# Altium PCB PCB2.PcbDoc
Units mm, origin at the board's own origin, x right, y up, seen from the top; angles counter-clockwise.
Board outline 70.66 x 68.07 mm, 2 copper layers (Top Layer, Bottom Layer); 10 components, 10 nets, 75 pads, 6 vias.
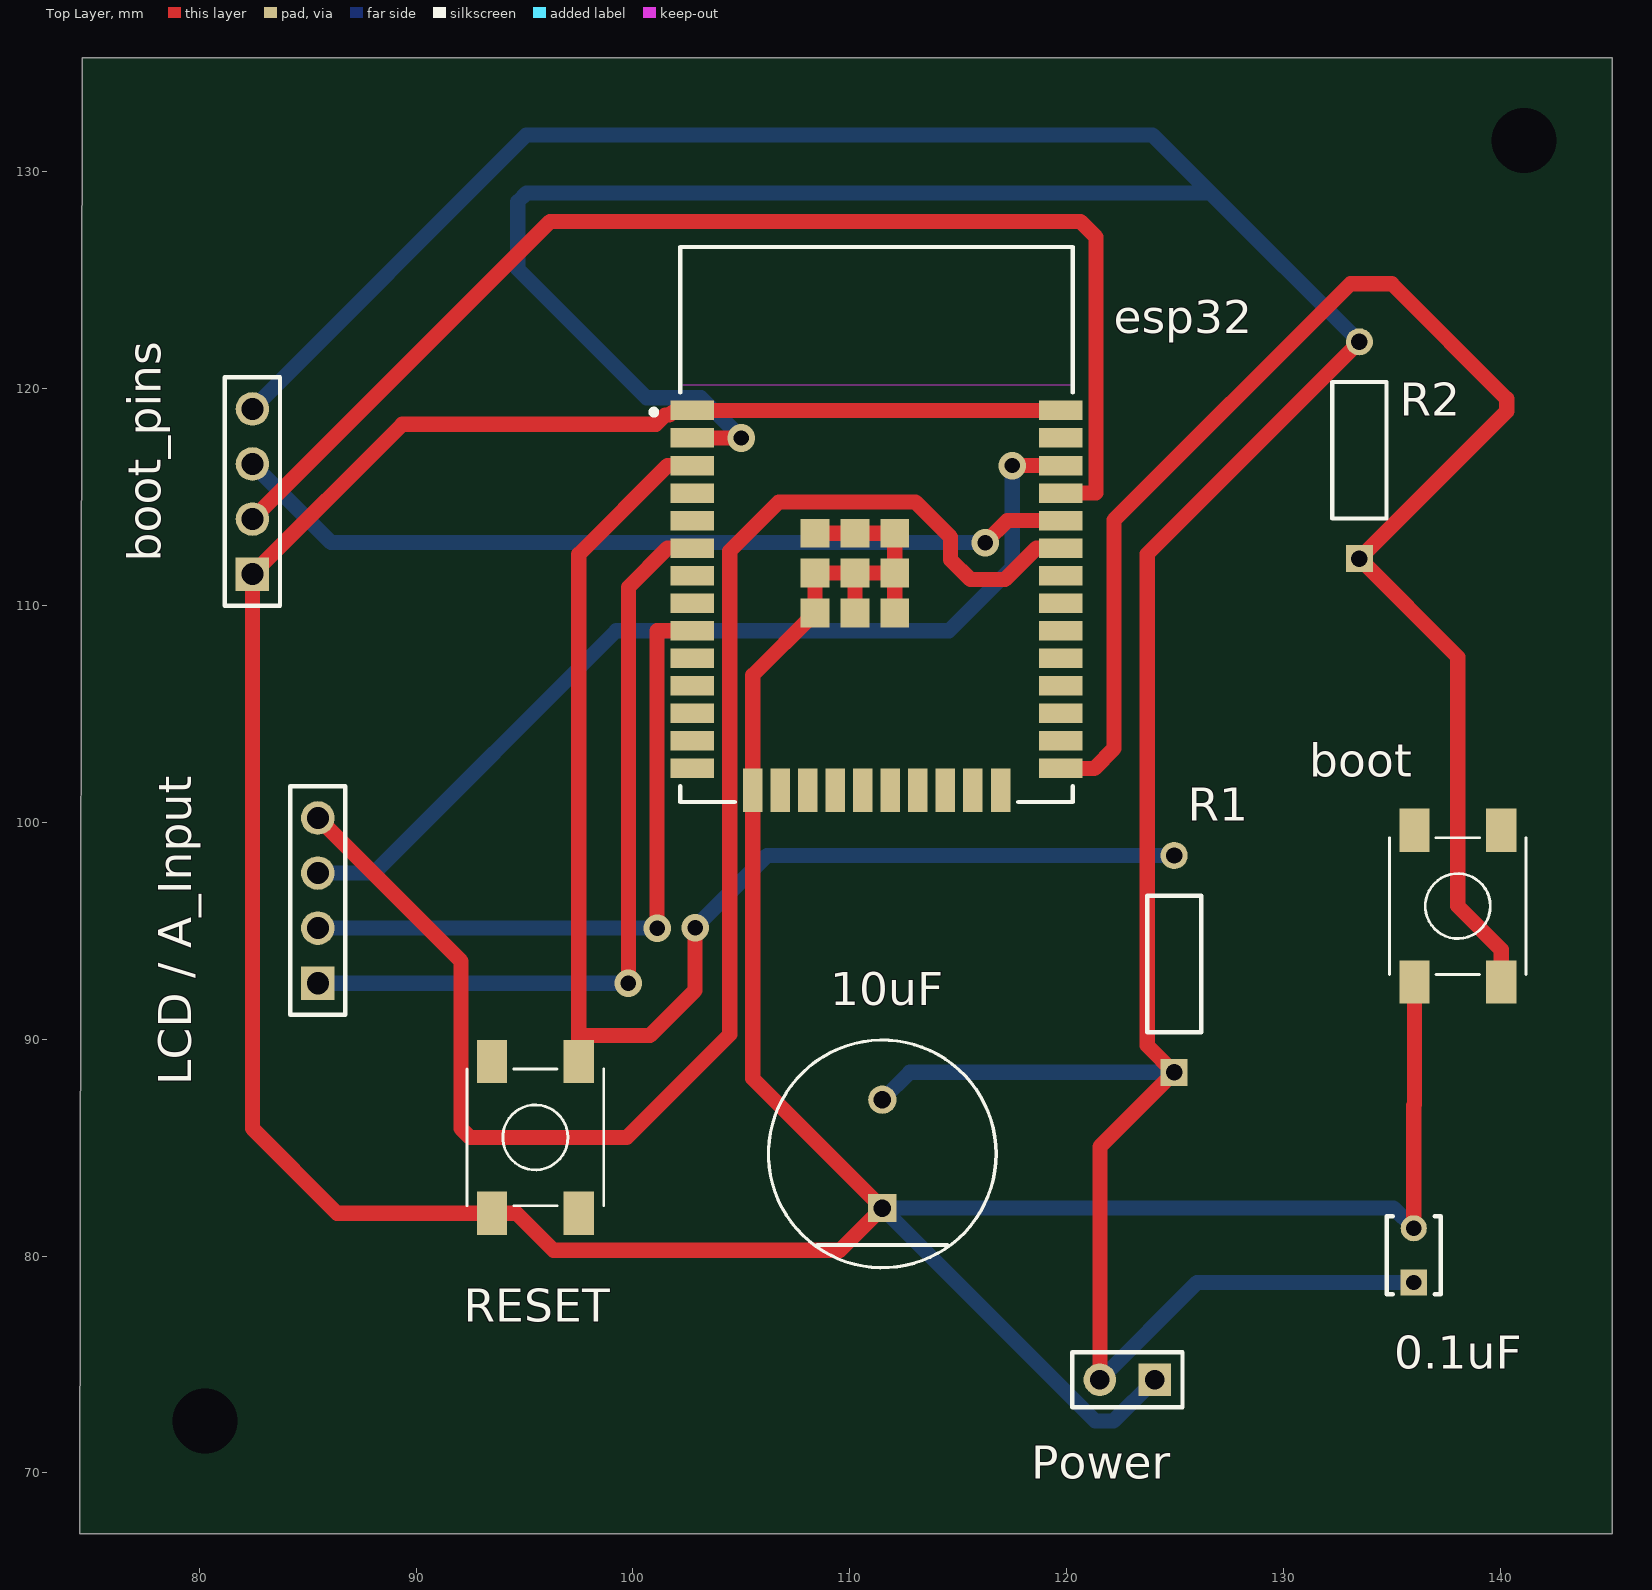
[diagram p0: Top Layer view]
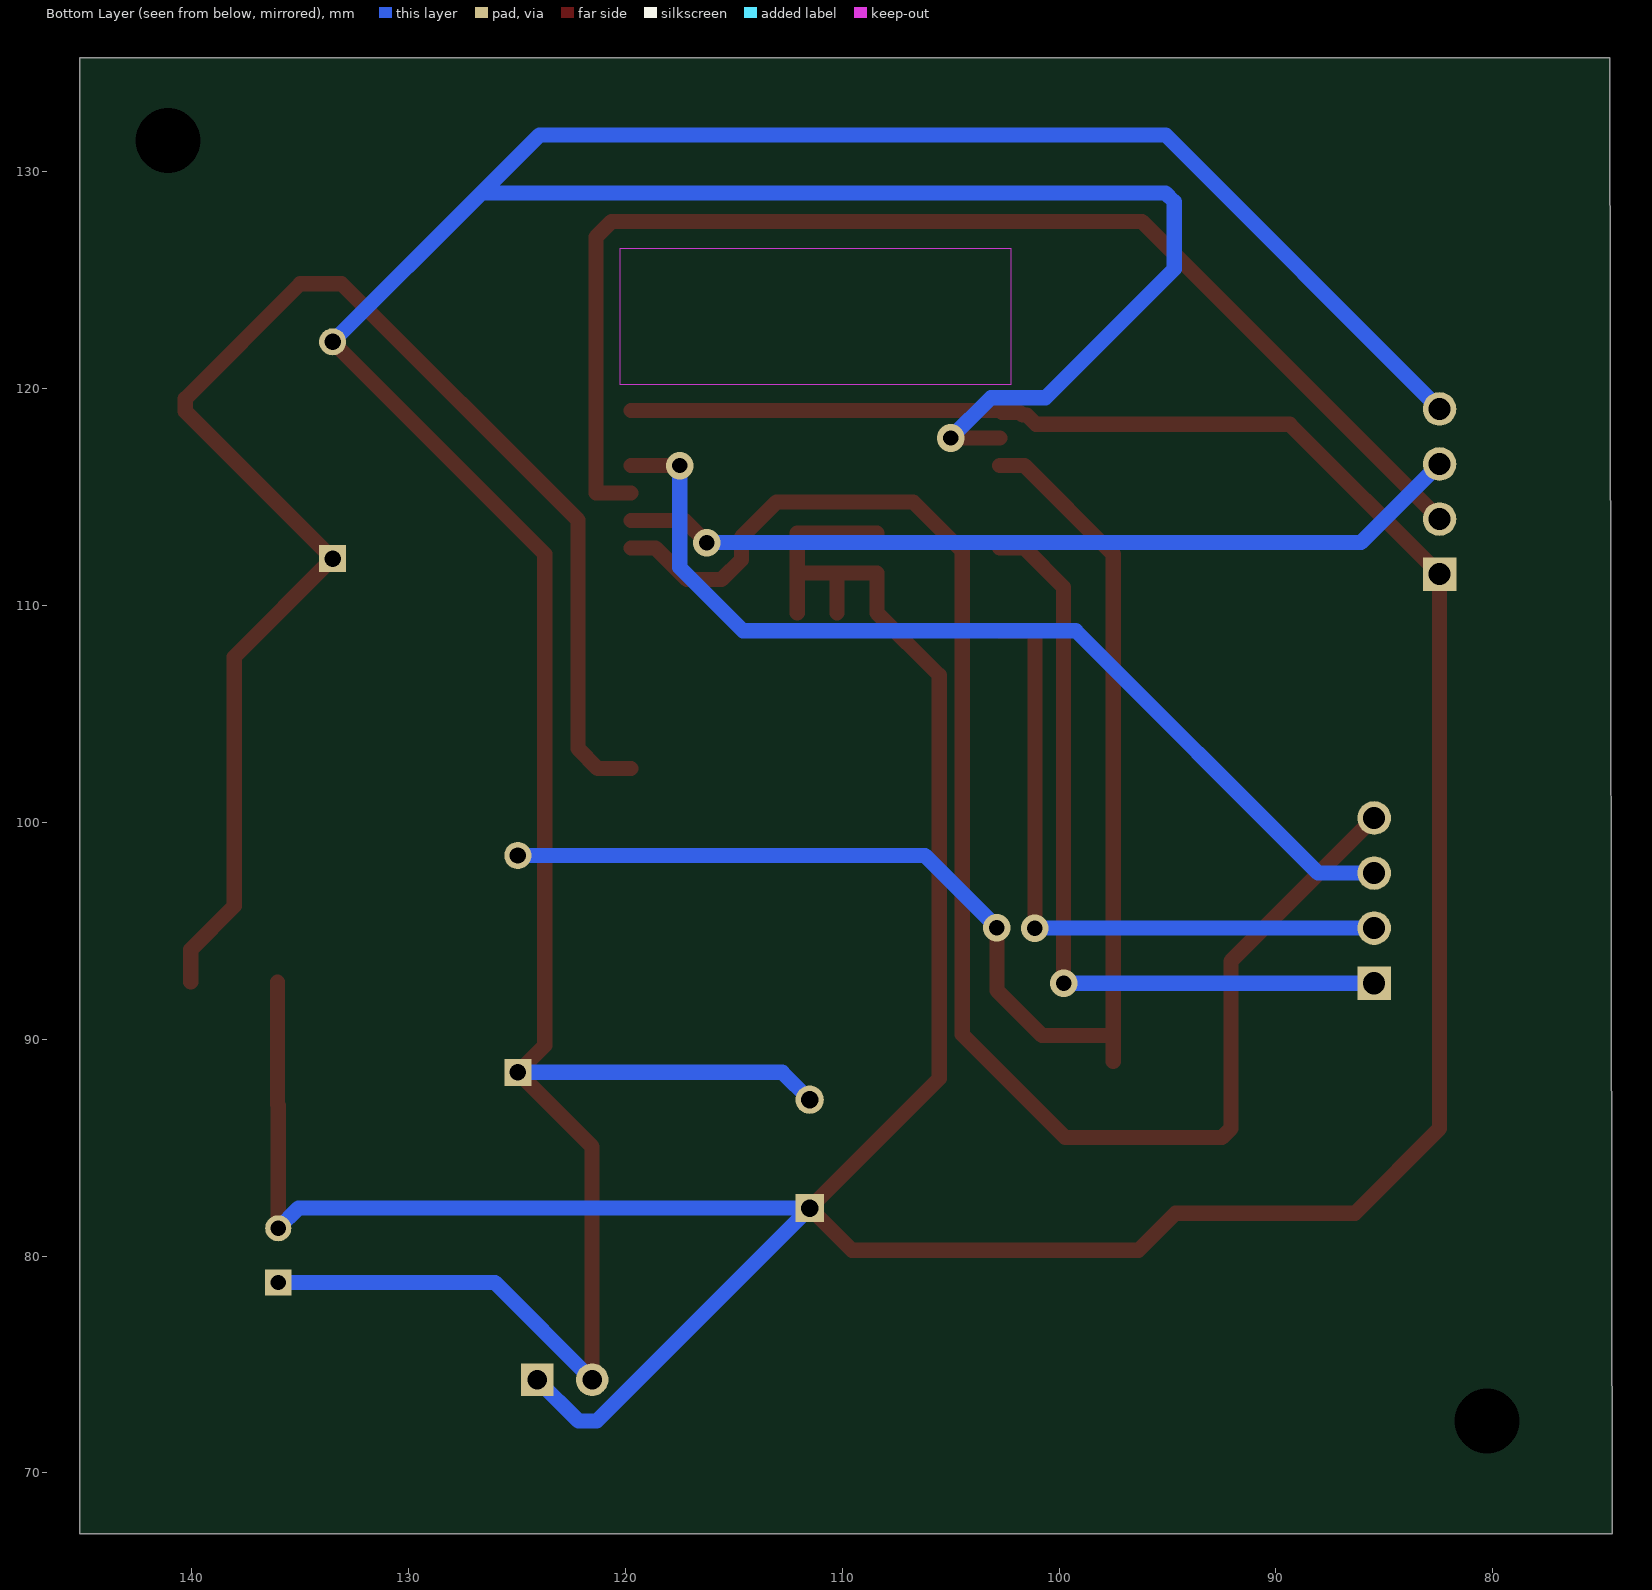
[diagram p1: Bottom Layer view, seen from below]
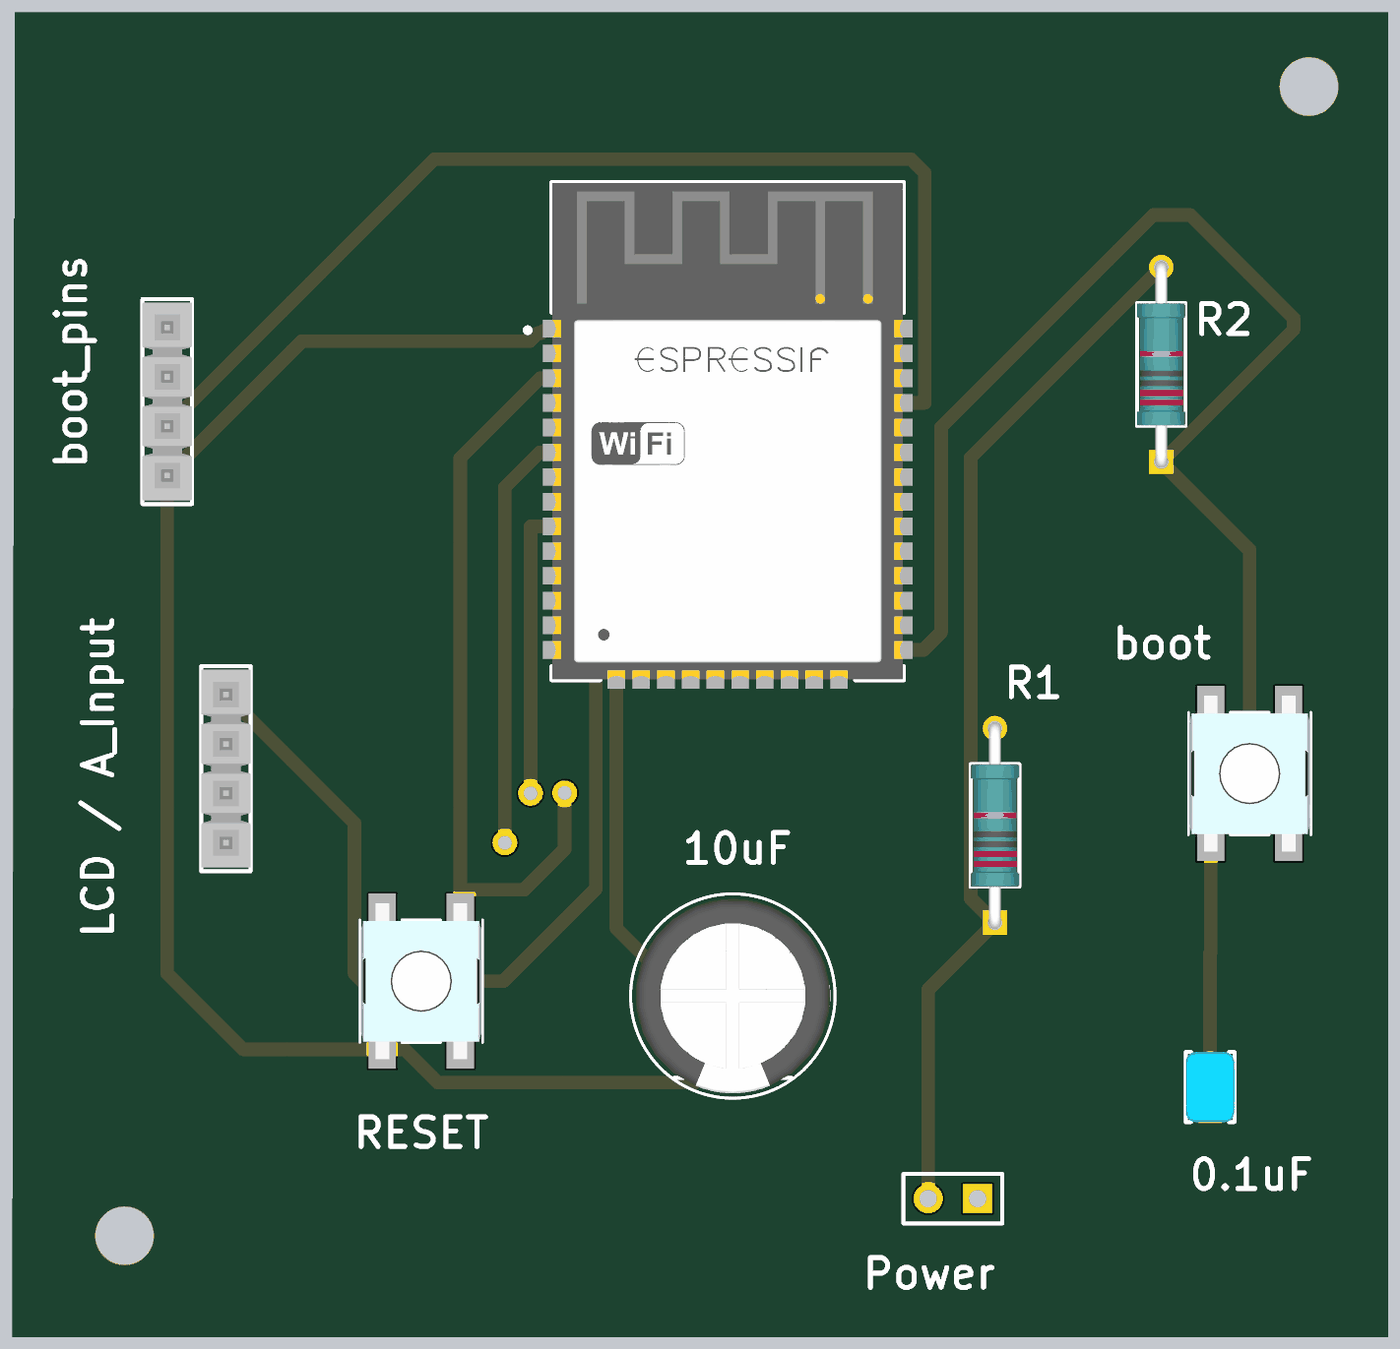
[diagram p2: 3D render of the assembled board from above, using the file's embedded part models]

## Layer stack, top to bottom
Top Solder: solder mask 0.0102, Solder Resist, Dk 3.5
Top Layer: signal copper 0.0356
Dielectric 1: dielectric 0.32, FR-4, Dk 4.8
Bottom Layer: signal copper 0.0356
Bottom Solder: solder mask 0.0102, Solder Resist, Dk 3.5

## Board outline
74.604,135.255 145.161,135.255 145.161,67.183 74.502,67.183

## Design rules (kind name [scope] priority, off if disabled: settings)
Clearance [All] p1: gap=0.254 ignorepadtopadclearanceinfootprint=FALSE except(0: Arc-Hole Track-Hole SMDPad-Hole THPad-Hole Via-Hole Fill-Hole Poly-Hole Region-Hole Text-Hole)
PolygonConnect [All] p1: connectstyle=Relief reliefconductorwidth=0.254 reliefentries=4 polygonreliefangle="90 Angle" airgapwidth=0.254
RoomDefinition Sheet2 [InComponentClass('Sheet2')] p1: confinementstyle=ConfineIn formatcopy=TRUE lockcomponents=FALSE outline 74.803,135.382 74.883,135.259 145.161,135.259 145.161,67.295 144.842,66.802 144.603,67.172 74.963,67.172 74.963,134.889 74.883,135.012
RoutingVias [All] p1: holewidth=0.711 width=1.27 viastyle="Through Hole" minholewidth=0.711 minwidth=1.27 maxholewidth=0.711 maxwidth=1.27
SolderMaskExpansion [All] p1: expansion=0.102 istentingtop=FALSE
Width [All] p1: maxlimit=1.5 minlimit=0.5 preferedwidth=0.7
30 further rules are at their usual default settings.

## Components (designator, comment, footprint, x,y, rotation, side; value= is the part's Value field where it differs from the comment)
0.1uF "C2" FP-RCE0DB-MFG 136.017,80.03 r90 top
10uF "C1" FP-RAD-TH-D_10_0_5-L_16_1-MFG 111.506,84.709 r90 top
boot "430471025826" 430471025826 138.049,96.139 r90 top
boot_pins "TSW-104-08-L-S" SMTC-TSW-104-08-X-S 82.455,111.45 r90 top
esp32 "ESP32-WROOM-32D" FP-ESP32-WROOM-32D-MFG 111.243,113.739 r0 top
"LCD / A_Input" "TSW-104-08-L-S" SMTC-TSW-104-08-X-S 85.471,92.583 r90 top
Power "Header 2" HDR1X2 124.079,74.295 r180 top
R1 "10k" FP-MBB0207-MFG 124.968,93.472 r90 top
R2 "10k" FP-MBB0207-MFG 133.509,117.165 r90 top
RESET "430471025826" 430471025826 95.504,85.471 r90 top

## Footprints (in the part's own frame and the unit in brackets; to place one, negate y for a bottom-side part, rotate by r counter-clockwise, add the part's x,y. Pads: shape width x height; smd on the part's side, far side on the other; paste and mask are expansions set on the pad)
430471025826 [mm] "6*6mm vertical type,SMD, height 2.5mm, white actuator, 260gf, T&R"
  rect 2x1.4 smd: 1(-3.5,2) 2(3.5,2) 3(-3.5,-2) 4(3.5,-2)
  silkscreen extent -3.15,-3.15 3.15,3.15, body extent -4,-3.1 4,3.1, height 2.49
FP-ESP32-WROOM-32D-MFG [mm]
  rect 2x0.9 smd paste+0 mask+0: 1(-8.5,5.26) 2(-8.5,3.99) 3(-8.5,2.72) 4(-8.5,1.45) 5(-8.5,0.18) 6(-8.5,-1.09) 7(-8.5,-2.36) 8(-8.5,-3.63) 9(-8.5,-4.9) 10(-8.5,-6.17) 11(-8.5,-7.44) 12(-8.5,-8.71) 13(-8.5,-9.98) 14(-8.5,-11.25) 25(8.5,-11.25) 26(8.5,-9.98) 27(8.5,-8.71) 28(8.5,-7.44) 29(8.5,-6.17) 30(8.5,-4.9) 31(8.5,-3.63) 32(8.5,-2.36) 33(8.5,-1.09) 34(8.5,0.18) 35(8.5,1.45) 36(8.5,2.72) 37(8.5,3.99) 38(8.5,5.26)
  rect 0.9x2 smd paste+0 mask+0: 15(-5.715,-12.25) 16(-4.445,-12.25) 17(-3.175,-12.25) 18(-1.905,-12.25) 19(-0.635,-12.25) 20(0.635,-12.25) 21(1.905,-12.25) 22(3.175,-12.25) 23(4.445,-12.25) 24(5.715,-12.25)
  rect 1.33x1.33 smd paste+0 mask+0: 39(-2.835,-4.075) 39(-2.835,-2.24) 39(-2.835,-0.405) 39(-1,-4.075) 39(-1,-2.24) 39(-1,-0.405) 39(0.835,-4.075) 39(0.835,-2.24) 39(0.835,-0.405)
  Keep-Out Layer region: -9,6.45 9,6.45 9,12.75 -9,12.75
  Keep-Out Layer region: -9,6.45 9,6.45 9,12.75 -9,12.75
  silkscreen extent -10.4,-12.8 9.05,12.8, body extent -9.6,-13.35 9.6,12.9, height 0.25
FP-MBB0207-MFG [mm]
  rect 1.25x1.25 hole 0.75 paste-1000 mask+0: 1(-5,0)
  round 1.25 hole 0.75 paste-1000 mask+0: 2(5,0)
  silkscreen extent -3.15,-1.25 3.15,1.25, body extent -5.72,-1.35 5.72,1.35, height 0.25
FP-RAD-TH-D_10_0_5-L_16_1-MFG [mm]
  rect 1.3x1.3 hole 0.8 paste-1000 mask+0: 1(-2.5,0)
  round 1.3 hole 0.8 paste-1000 mask+0: 2(2.5,0)
  silkscreen extent -5.25,-5.25 5.25,5.25, body extent -5.35,-5.35 5.35,5.35, height 0.25
FP-RCE0DB-MFG [mm]
  rect 1.2x1.2 hole 0.7 paste-1000 mask+0: 1(-1.25,0)
  round 1.2 hole 0.7 paste-1000 mask+0: 2(1.25,0)
  silkscreen extent -1.8,-1.25 1.8,1.25, body extent -1.95,-1.35 1.95,1.35, height 0.25
HDR1X2 [mm] "Connector; Header; 2 Position"
  rect 1.5x1.5 hole 0.9: 1(0,0)
  round 1.5 hole 0.9: 2(2.54,0)
  silkscreen extent -1.27,-1.27 3.81,1.27
SMTC-TSW-104-08-X-S [mm] ".025 SQ Post Terminal Strip Assembly, 1x4 Pins, Vertical, 2.54mm Pitch, Male"
  rect 1.55x1.55 hole 1.02: 1(0,0)
  round 1.55 hole 1.02: 2(2.54,0) 3(5.08,0) 4(7.62,0)
  silkscreen extent -1.46,-1.27 9.08,1.27, body extent -1.27,-1.27 8.89,1.27, height 8.38

## Part data
0.1uF: library part CMP-06035-048089-1, "Cap Ceramic 100nF 50V X7R ±10% Radial 2.5mm +125°C Ammo Pack", Capacitance=100nF, Case/Package=Radial, Dielectric=X7R, Max Operating Temperature=125°C, Min Operating Temperature=-55°C, Package Quantity=2000, Ratings=AEC-Q200, Resistor Type=Ceramic, Tolerance=10%, Voltage Rating=50V, Height=3.5mm, Height - Seated (Max)=0.138inch, Lead Diameter=0.5mm, Lead Free="Lead Free", Lead Pitch=0.098inch, Lead/Base Style=Straight, Length=0.142inch, Mount="Through Hole", Packaging="Tape and Reel", Termination=Radial, Voltage Rating (DC)=50V, Width=0.098inch
10uF: library part CMP-05427-000979-1, "Aluminum Electrolytic Capacitors (Radial Lead Type) AEC-Q200 Qualified 1000uF ±20% 10V", Capacitance=1mF, Case/Package=Radial, Dielectric Material=Aluminium, ESR (Equivalent Series Resistance)=68mR, Leakage Current=3uA, Max Operating Temperature=105°C, Min Operating Temperature=-55°C, Package Quantity=200, Ratings=AEC-Q200, Ripple Current=1.05A, Tolerance=20%, Voltage=10V, Construction=RADIAL, Contact Plating=Tin, Diameter=10mm, Height=16mm, Height - Seated (Max)=0.63inch, Impedance=68mR, Lead Diameter=0.6mm, Lead Free="Lead Free", Lead Pitch=5mm, Length=16mm, Life (Hours)=3000Hour, Mount="Through Hole", Packaging=Bulk, Radiation Hardening=No, REACH SVHC="No SVHC", RoHS Compliant=Yes, Series=FC, Size=16mm, Termination=Radial, Voltage Rating=10V, Voltage Rating (DC)=10V
boot RESET: library part CMP-1452-00022-1, "WS-TASV SMD Tact Switch 6X6 mm", Manufacturer="Wuerth Elektronik", ComponentLink1Description="Manufacturer URL", ComponentLink1URL=http://www.we-online.com, ComponentLink2Description=Datasheet, ComponentLink2URL=http://katalog.we-online.de/em/datasheet/4304x1.pdf, NoPins=04, PackageReference=430471025826, PartNumber=430471025826
boot_pins "LCD / A_Input": library part CMP-1024-00358-1, "0.025\" SQ Post Header, Through-hole, Vertical, -55 to 125 degC, 2.54 mm Pitch, 4-Pin, Male, RoHS", Manufacturer=Samtec, Temperature Range="-55 to 125 degC", ComponentLink1Description="Manufacturer URL", ComponentLink1URL=http://www.samtec.com, ComponentLink2Description=Datasheet, ComponentLink2URL=http://www.samtec.com/documents/webfiles/pdf/TSW_TH.PDF, ComponentLink3Description="Package Specification", ComponentLink3URL=http://www.samtec.com/documents/webfiles/cpdf/TSW-XXX-XX-XXX-X-XX-XXX-MKT.pdf, DatasheetVersion=F-214, Mounting Technology=Through-hole, Orientation=Vertical, PackageDescription=".025[0.64] SQ. Post Terminal Strip Assembly", PackageReference=TSW-104-08-X-S, PackageVersion="DM, 8/1988", PartNumber=TSW-104-08-L-S, Pitch="2.54 mm", RoHS=True
esp32: library part CMP-194065-000003-1, "WIFI MODULE 32MBITS SPI FLASH", Manufacturer="Espressif Systems", Max Frequency=2484MHz, Max Supply Voltage=3.6V, Min Supply Voltage=3V, Nominal Supply Current=500mA, Temperature="-40°C to +85°C", Temperature Range High=+85°C, Temperature Range Low=-40°C, Automotive=No, Bandwidth=72MHz, Category=UNK, ComponentLink2Description=Datasheet, ComponentLink2URL=https://www.espressif.com/sites/default/files/documentation/esp32-wroom-32d_esp32-wroom-32u_datasheet_en.pdf, Data Rate=150Mbits/s, Device Class L1="Integrated Circuits (ICs)", Device Class L2="RF Semiconductors and Devices", Device Class L3=Transceivers, Digikey Description="WIFI MODULE 32MBITS SPI FLASH", Height=3.2mm, Interface=I2C,SPI,UART,Ethernet,I2S,Other, Lead Free=Yes, Manufacturer Part Number=ESP32-WROOM-32D, Mouser Description="Wi-Fi/BT BLE Module ESP32-D0WD, SPI Flash, UART, P", Number Of Adc Channels=16, Number Of Gpio=32, Octopart=https://octopart.com/esp32-wroom-32d-espressif+systems-91040050, Package=ESP32-WROOM-32D, RoHS=TRUE, Sensitivity=-98dBm
Power: library part CMP-307-000070-1, "Header, 2-Pin", Component Type=Standard, Design Item ID="Header 2", LatestRevisionDate=17-Jul-2002, LatestRevisionNote="Re-released for DXP Platform.", Pin Count=2, Publisher="Altium Limited", Source="Miscellaneous Connectors.SchLib"
R1 R2: library part CMP-02408-000035-1, "RES 10K OHM 0.6W 1% AXIAL", Case/Package=Conformal, Max Operating Temperature=155°C, Max Power Dissipation=600mW, Min Operating Temperature=-55°C, Resistance=10kR, Resistance Tolerance=1%, Resistor Type="Metal Film", Temperature Coefficient=50ppm/°C, Voltage Rating=300V, Construction=Cylindrical, Contact Plating=Tin, Diameter=2.5mm, Features="Automotive AEC-Q200", Lead Free="Lead Free", Length=6.5mm, Military Standard=Not, Number of Terminations=2, Packaging="Tape and Reel", Power Rating=600mW, Radiation Hardening=No, RoHS Compliant=Yes, Series="MBB 0207 - Professional", Technology="THIN FILM", Termination=Axial, Tolerance=1%, Voltage Rating (DC)=300V

## Free pads (board coordinates)
  round 1.524 hole 3: 1(80.264,72.39) 2(141.097,131.445)

## Via types
v1: diameter 1.27, hole 0.711, Top Layer to Bottom Layer, 6 vias

## Nets (pads, with @x,y where several pads share a name; then routed paths per layer and width w, separated by ;. In a path a pad name is that pad's centre, name@x,y a point inside that pad or via, vN(x,y) a via of type N, cw(c..) or ccw(c..) an arc to the next point about the centre after c; other vN are vias at no path point)
Net0.1uF_1: 0.1uF.1 10uF.2 boot_pins.4 esp32.2 Power.2 R1.1 R2.2 | length 195.4
  Top Layer w0.7: esp32.2 v1(105.004,117.729) ; Power.2 121.539,85.043 R1.1 123.723,89.717 123.723,112.379 R2.2
  Bottom Layer w0.7: boot_pins.4 95.084,131.699 123.975,131.699 126.642,129.032 ; v1(105.004,117.729) 103.148,119.585 100.633,119.585 94.691,125.527 94.691,128.622 95.101,129.032 126.642,129.032 ; 10uF.2 112.769,88.472 R1.1 ; Power.2 126.024,78.78 0.1uF.1 ; R2.2 126.642,129.032
Net0.1uF_2: 0.1uF.2 10uF.1 boot.1 boot_pins.1 esp32.1 esp32.15 esp32.38 esp32.39 Power.1 RESET.1 | length 197.7
  Top Layer w0.7: esp32.39@108.408,113.334 110.243,113.334 112.078,113.334 esp32.39@112.078,111.499 ; esp32.39@110.243,109.664 esp32.39@110.243,111.499 ; esp32.39@112.078,109.664 esp32.39@112.078,111.499 ; esp32.38 esp32.1 102.643,118.899 101.799,118.899 101.683,118.783 101.493,118.783 101.074,118.364 89.369,118.364 boot_pins.1 82.455,85.876 86.36,81.971 RESET.1 94.635,81.971 96.342,80.264 109.561,80.264 10uF.1 105.528,88.187 esp32.15 105.528,106.784 108.408,109.664 108.408,111.499 esp32.39@110.243,111.499 ; 0.1uF.2 136.017,86.944 136.049,86.976 boot.1 ; esp32.39@110.243,111.499 esp32.39@112.078,111.499
  Bottom Layer w0.7: Power.1 122.174,72.39 121.325,72.39 10uF.1 135.088,82.209 0.1uF.2
Netboot_3: boot.3 esp32.25 R2.1 | length 70.6
  Top Layer w0.7: esp32.25 121.285,102.489 122.199,103.403 122.199,113.944 133.096,124.841 135.001,124.841 140.303,119.539 140.303,118.959 R2.1 138.049,107.625 138.049,96.139 140.049,94.139 boot.3
Netboot_pins_2: boot_pins.2 esp32.35 | length 58.3
  Top Layer w0.7: boot_pins.2 96.176,127.711 120.65,127.711 121.361,127 121.361,115.189 esp32.35
Netboot_pins_3: boot_pins.3 esp32.34 | length 39.2
  Top Layer w0.7: v1(116.256,112.903) 117.272,113.919 esp32.34
  Bottom Layer w0.7: boot_pins.3 86.082,112.903 v1(116.256,112.903)
Netesp32_3: esp32.3 R1.2 RESET.4 | length 62.9
  Top Layer w0.7: RESET.4 97.504,90.17 ; esp32.3 101.6,116.459 97.504,112.363 97.504,90.17 ; v1(102.87,95.148) 102.87,92.253 100.787,90.17 97.504,90.17
  Bottom Layer w0.7: v1(102.87,95.148) 106.194,98.472 R1.2
Netesp32_6: "LCD / A_Input.1" esp32.6 | length 36.3
  Top Layer w0.7: v1(99.797,92.583) 99.797,110.846 101.6,112.649 esp32.6
  Bottom Layer w0.7: 85.471,92.583 v1(99.797,92.583)
Netesp32_9: "LCD / A_Input.2" esp32.9 | length 31
  Top Layer w0.7: v1(101.117,95.123) 101.117,108.839 esp32.9
  Bottom Layer w0.7: 85.471,95.123 v1(101.117,95.123)
Netesp32_33: "LCD / A_Input.4" esp32.33 | length 72.8
  Top Layer w0.7: 85.471,100.203 92.075,93.599 92.075,85.881 92.485,85.471 99.72,85.471 104.47,90.221 104.47,112.522 106.731,114.783 113.03,114.783 114.656,113.157 114.656,112.116 115.57,111.201 117.17,111.201 118.618,112.649 esp32.33
Netesp32_36: "LCD / A_Input.3" esp32.36 | length 44.8
  Top Layer w0.7: v1(117.5,116.459) esp32.36
  Bottom Layer w0.7: 85.471,97.663 88.062,97.663 99.238,108.839 114.579,108.839 117.5,111.76 v1(117.5,116.459)
pads on no net: boot.2 boot.4 esp32.4 esp32.5 esp32.7 esp32.8 esp32.10 esp32.11 esp32.12 esp32.13 esp32.14 esp32.16 esp32.17 esp32.18 esp32.19 esp32.20 esp32.21 esp32.22 esp32.23 esp32.24 esp32.26 esp32.27 esp32.28 esp32.29 esp32.30 esp32.31 esp32.32 esp32.37 RESET.2 RESET.3